# EAGLE board 1x3Connection (EAGLE 7.3.0)
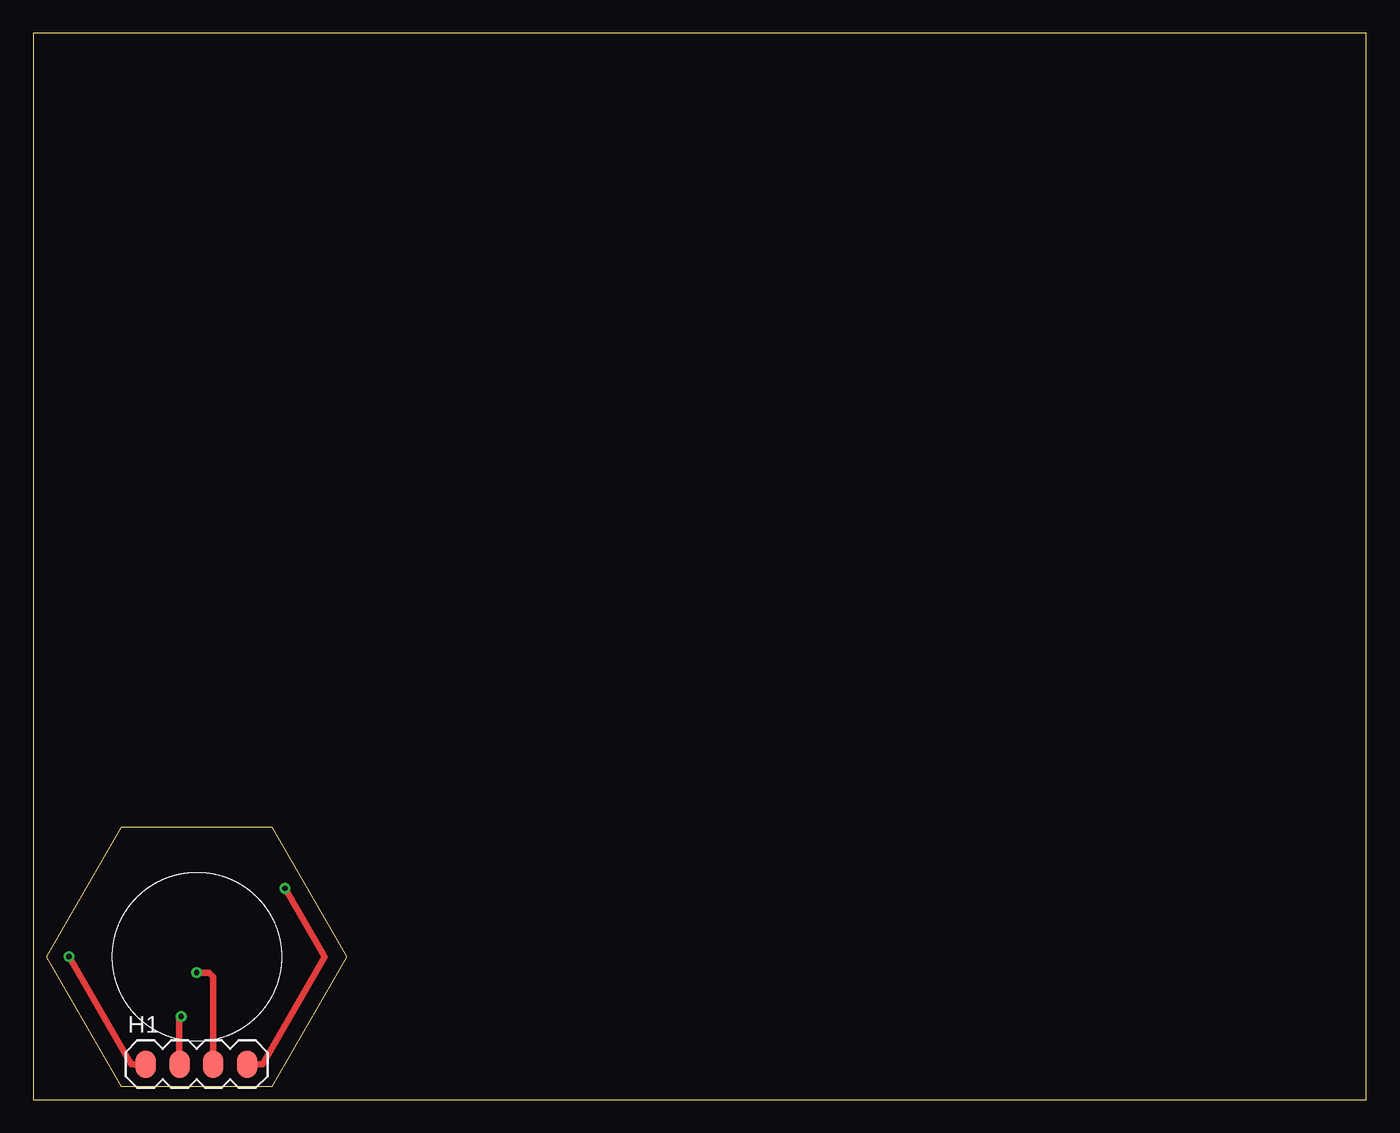
[diagram p0: board, top side]
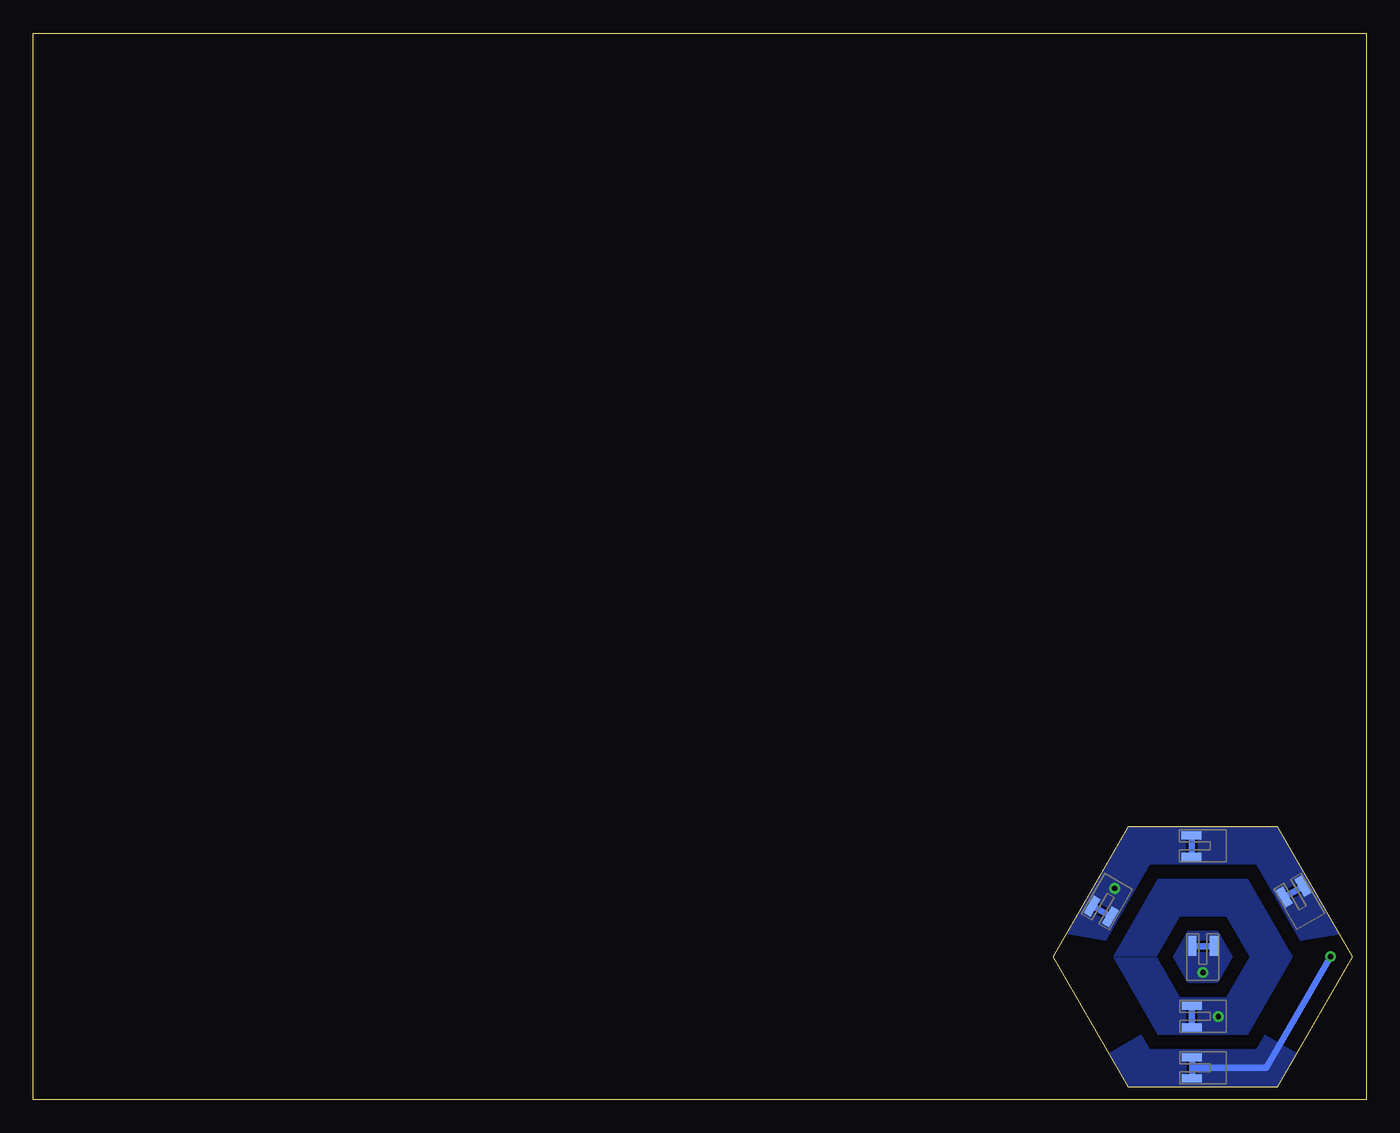
[diagram p1: board, bottom side, seen from below]

Size 100 x 80 mm. Coordinates in mm from the lower left corner, seen from the top.
Outline: 0,0 100,0 100,80 0,80 0,0
Outline: 6.61,20.44 17.86,20.44 23.49,10.7 17.86,0.96 6.61,0.96 0.99,10.7 6.61,20.44
Copper layers (1*16): Top 0.035mm / dielectric 1.5mm / Bottom 0.035mm
Design rules "default *": minimum track width 10mil, minimum drill 24mil, track to track 8mil, track to pad 8mil, pad to pad 8mil, via to via 8mil, smd to smd 8mil, copper to edge 0mil, drill to drill 8mil, minimum pad ring 10mil, minimum via ring 8mil, stop-mask expansion 4mil, vias tented up to drill 0mil, thermal gap 0mil

## Footprints (pad centres in the part's own frame; a part is rotated, then mirrored left to right if it is on the bottom)
SHIELD_FINGER_PKG = smd 1.5 x 0.6 bottom: P1 0.025,0.787; P2 0.025,-0.813
1X04_NO_HOLES = smd 1.524 x 2.032: 1 0,0; 2 2.54,0; 3 5.08,0; 4 7.62,0

## Placement (x,y rotation side)
CON1  SHIELD_FINGER0820  [SHIELD_FINGER_PKG]  19.87,14.14 300 top
CON2  SHIELD_FINGER0820  [SHIELD_FINGER_PKG]  13.08,19.03 0 top
CON3  SHIELD_FINGER0820  [SHIELD_FINGER_PKG]  5.43,15.59 60 top
CON4  SHIELD_FINGER0820  [SHIELD_FINGER_PKG]  12.23,11.51 90 top
CON5  SHIELD_FINGER0820  [SHIELD_FINGER_PKG]  13.07,6.25 0 top
CON6  SHIELD_FINGER0820  [SHIELD_FINGER_PKG]  13.06,2.39 0 top
H1  [1X04_NO_HOLES]  8.43,2.65 0 top

## Library data of the parts
CON1-CON6 = MakerShoe
H1 = SparkFun-Connectors

## Nets
GND: CON4.P1 CON4.P2 H1.3
PWR: CON5.P1 CON5.P2 H1.2
SIN: CON6.P1 CON6.P2 H1.1
SOUT: CON1.P1 CON1.P2 CON2.P1 CON2.P2 CON3.P1 CON3.P2 H1.4

## Tracks (layer width: path | path; a pad name or v marks a point on that pad's centre or on a via)
GND  (via drill 0.4)
  Top 0.5: H1.3 13.5,9.2 13.2,9.5 12.25,9.5 v12.25,9.53
  pour Bottom: 11.11,12.65 13.36,12.65 14.49,10.7 13.36,8.75 11.11,8.75 9.99,10.7
PWR  (via drill 0.4)
  Top 0.5: H1.2 10.95,2.65 10.95,6.05 11.1,6.2 v11.09,6.22
  pour Bottom: 15.71,10.66 13.99,7.68 10.49,7.68 8.74,10.71 10.49,13.74 13.99,13.74 15.72,10.74 18.97,10.74 15.61,16.55 8.86,16.55 5.49,10.71 8.86,4.86 15.61,4.86 18.96,10.66
SIN  (via drill 0.4)
  Top 0.5: H1.1 7.35,2.65 2.7,10.7 v2.67,10.72
  Bottom 0.5: 13.05,2.4 7.5,2.4 2.65,10.75 v2.67,10.72
  pour Bottom: 16.86,4.86 16.24,3.78 8.24,3.78 7.61,4.87 7.61,4.87 5.17,3.46 5.17,3.46 6.61,0.96 17.86,0.96 19.31,3.47 19.31,3.47 16.87,4.88
SOUT  (via drill 0.4)
  Top 0.5: H1.4 17.2,2.65 21.85,10.7 18.9,15.85 v18.87,15.85
  pour Bottom: 16.23,17.64 19.51,11.92 22.51,12.42 17.86,20.44 6.61,20.44 1.98,12.4 4.93,11.92 8.23,17.64